# EAGLE board NINJA-001 (EAGLE 9.6.1)
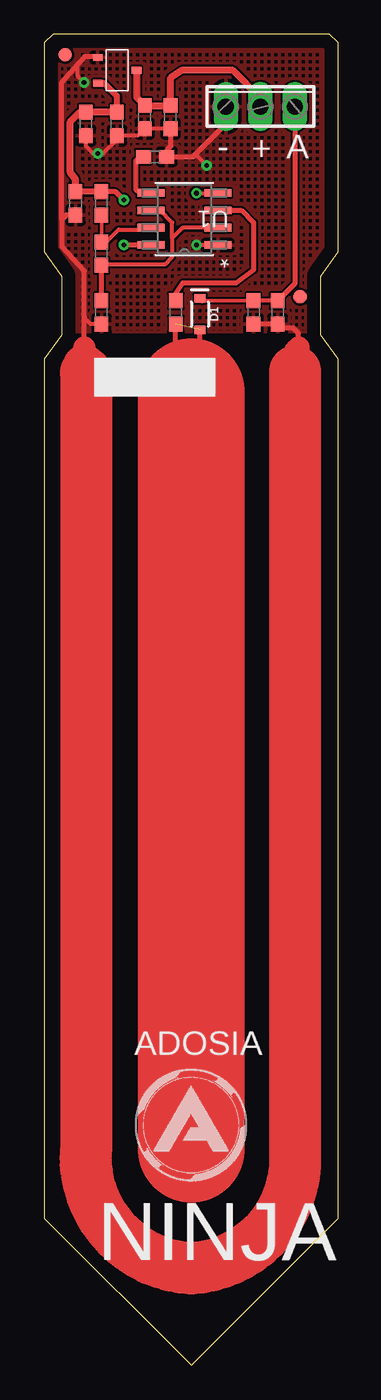
[diagram p0: board, top side]
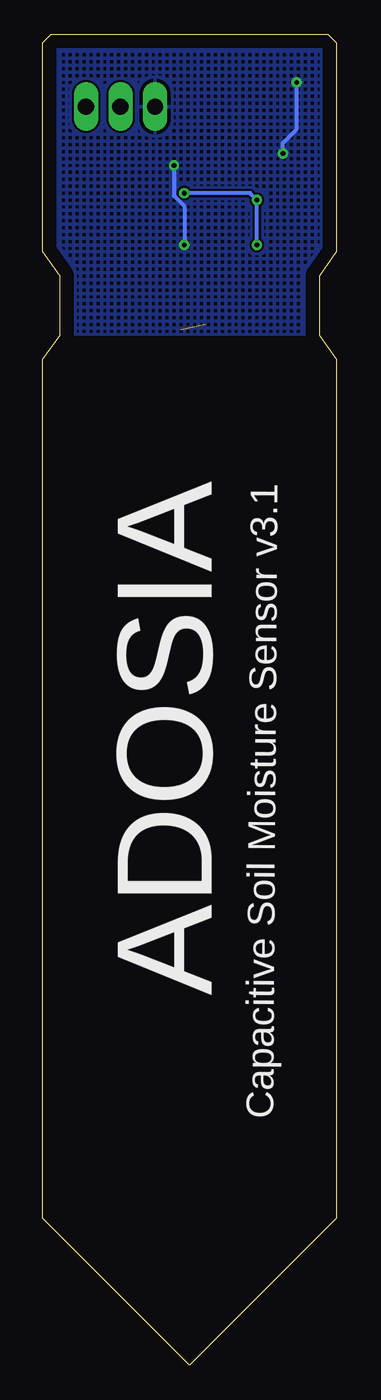
[diagram p1: board, bottom side, seen from below]

Size 21.59 x 97.79 mm. Coordinates in mm from the lower left corner, seen from the top.
Outline: 10.79,0 21.59,10.79 21.59,73.91 20.32,75.69 20.32,80.01 21.59,81.79 21.59,97.16 20.95,97.79 0.64,97.79 0,97.16 0,81.79 1.27,80.01 1.27,75.69 0,73.91 0,10.79 10.79,0
Copper layers (1*16): Top 0.035mm / dielectric 1.5mm / Bottom 0.035mm
Design rules "default": minimum track width 6mil, minimum drill 0.35mm, track to track 6mil, track to pad 6mil, pad to pad 6mil, via to via 6mil, smd to smd 6mil, copper to edge 40mil, drill to drill 6mil, minimum pad ring 10mil, minimum via ring 8mil, stop-mask expansion 4mil, vias tented up to drill 0mil, thermal gap 10mil

## Footprints (pad centres in the part's own frame; a part is rotated, then mirrored left to right if it is on the bottom)
0603 = smd 1.1 x 1: 1 -0.85,0; 2 0.85,0
SOD-323 = smd 0.63 x 0.83: A 1.15,0; C -1.15,0
FIDUCIAL-1X2 = smd 1 x 1: 1 0,0
3POL254 = drill 1.2 long: 1 -2.54,0; 2 0,0; 3 2.54,0
XC6206_SOT-23 = smd 0.5 x 0.7: 1 -0.95,-1.415; 2 0.95,-1.415; 3 0,1.44
D8 = smd 1.981 x 0.559: 1 -2.464,1.905; 2 -2.464,0.635; 3 -2.464,-0.635; 4 -2.464,-1.905; 5 2.464,-1.905; 6 2.464,-0.635; 7 2.464,0.635; 8 2.464,1.905

## Placement (x,y rotation side)
C1  0.1uF  [0603]  5.33,91.19 90 top
C2  4.7uF  [0603]  3.05,91.19 90 top
C3  1.0uF  [0603]  17.14,77.34 90 top
C4  0.1uF  [0603]  2.29,85.34 270 top
C5  470pF  [0603]  4.19,77.34 270 top
C6  0.1uF  [0603]  9.27,91.69 90 top
C7  10nF  [0603]  8.13,88.77 180 top
C8  4.7uF  [0603]  7.37,91.69 90 top
D1  1N4148WS  [SOD-323]  11.43,77.22 270 top
FD1  FIDUCIAL1X2  [FIDUCIAL-1X2]  18.8,78.49 0 top
FD2  FIDUCIAL1X2  [FIDUCIAL-1X2]  1.52,96.27 0 top
J1  SIP3  [3POL254]  15.88,92.46 0 top
P1  XC6206P302  [XC6206_SOT-23]  5.33,95.12 270 top
R1  1M  [0603]  15.37,77.34 270 top
R2  10k  [0603]  9.65,77.34 270 top
R3  330  [0603]  4.19,85.34 90 top
R4  1.6k  [0603]  4.19,81.66 270 top
U1  TLC555CDR  [D8]  10.29,84.2 180 top

## Library data of the parts
C1 C4 C6 = SparkFun-Capacitors; PROD_ID: CAP-08604
C2 C8 = SparkFun-Capacitors; PROD_ID: CAP-08280
C3 = SparkFun-Capacitors; PROD_ID: CAP-00868
C5 = SparkFun-Capacitors; PROD_ID: CAP-07884
C7 = SparkFun-Capacitors; PROD_ID: CAP-00867
D1 = SparkFun-DiscreteSemi; PROD_ID: DIO-09646
FD1 FD2 = SparkFun-Aesthetics
J1 = con-phoenix-254; OC_FARNELL: unknown; OC_NEWARK: unknown
P1 = Voltage-Regulator-Custom
R1 = SparkFun-Resistors; PROD_ID: RES-07868
R2 = SparkFun-Resistors; PROD_ID: RES-00824
R3 = SparkFun-Resistors; PROD_ID: RES-00818
R4 = SparkFun-Resistors; PROD_ID: RES-08361
U1 = TLC555CDR; MANUFACTURER_PART_NUMBER: TLC555CDR; VENDOR: Texas Instruments

## Nets
A: C3.2 D1.C J1.3 R1.1
GND: C1.1 C2.1 C3.1 C4.2 C5.2 C6.1 C7.1 C8.1 J1.1 P1.1 R1.2 U1.1
N$1: R2.1 U1.3
N$3: D1.A R2.2
N$4: R3.1 R4.1 U1.7
N$5: C7.2 U1.5
N$6: C5.1 R4.2 U1.2 U1.6
VCC: C6.2 C8.2 J1.2 P1.3
VDD: C1.2 C2.2 C4.1 P1.2 R3.2 U1.4 U1.8

## Tracks (layer width: path | path; a pad name or v marks a point on that pad's centre or on a via)
A
  Top 0.254: 11.6,78.19 15.29,78.19 R1.1
  Top 0.305: 17.05,78.19 15.29,78.19
  Top 0.356: D1.C 11.6,78.19 | 17.05,78.19 C3.2 18.41,79.46 J1.3
GND  (via drill 0.35)
  Top 0.152: 2.92,74.78 3.05,74.65 3.05,72.9
  Top 0.305: v11.94,88.14 11.11,88.96 | U1.1 v11.18,82.3 | C6.1 C8.1 6.86,90.34 C1.1 5.33,90.04 4.32,89.03 v3.94,89.03 3.56,89.03 3.05,89.53 C2.1 | v2.92,94.23 2.45,94.71 2.45,95.57 | C5.2 3.39,76.49 2.92,76.96
  Top 0.356: C6.1 9.27,89.53 9.02,89.28 9.02,88.94 C7.1 10.92,88.77 11.11,88.96 13.34,91.19 J1.1 | P1.1 3.85,96.14 2.95,96.14 2.58,95.71 2.45,95.57 1.27,94.23 1.27,84.17 | 1.27,84.17 1.27,82.17 2.92,80.39 2.92,76.96 2.92,74.78 | 18.67,74.78 18.67,75.82 18.29,76.2 17.57,76.2 C3.1 R1.2 | C4.2 1.6,84.49 1.27,84.17
  Top 1.6: 2.92,73.41 2.92,74.78 | 18.41,73.03 18.41,74.52 18.67,74.78
  Top 3.175: 3.05,72.9 3.05,73.28 2.92,73.41
  Top 3.81: 3.05,72.9 3.05,15.73 arc90 10.79,7.13 arc90 18.41,15.59 18.41,73.03
  Bottom 0.305: v11.18,82.3 11.18,85.14 11.94,85.9 v11.94,88.14 | v3.94,89.03 3.94,89.79 2.92,90.81 v2.92,94.23
  pour Top (hatched): -0.63,75.95 22.35,75.95 22.35,98.42 -0.51,98.42
  pour Bottom (hatched): -0.38,98.42 -0.64,75.69 22.1,75.69 22.48,76.07 22.48,98.42 22.35,98.55
N$1
  Top 0.356: R2.1 9.65,78.74 10.16,79.5 14.1,79.5 15.37,80.45 15.37,83.95 14.48,84.84 U1.3
N$2
  cutout Bottom: -0.64,75.56 -0.64,75.44 22.35,75.44 22.35,65.53 22.35,-0.38 22.35,-0.51 -0.51,-0.51 -0.51,75.56
N$3  (1 unrouted)
  Top 0.305: 11.43,75.44 10.79,74.8 10.79,74.04 | 10.79,73.88 9.61,75.06 | 10.79,71.5 10.79,73.28 | 10.79,73.28 11.43,73.91 | 10.79,73.28 10.79,74.04 | 10.79,74.04 11.43,74.68
  Top 0.356: 9.61,75.06 9.65,75.07 R2.2 | 11.43,73.91 11.43,74.68 11.43,75.44 D1.A | 10.79,71.5 10.67,72.02
  Top 7.874: 10.79,15.88 10.79,71.5
N$4
  Top 0.254: R3.1 R4.1
  Top 0.305: R4.1 4.53,82.51 5.46,83.44 7.7,83.44 U1.7
N$5
  Top 0.356: U1.5 7.24,86.11 7.11,86.23 6.86,86.23 6.73,86.36 6.73,88.52 C7.2
N$6
  Top 0.305: R4.2 4.28,80.9 8.89,80.9 9.4,81.41 9.4,82.8 | 9.4,82.8 9.4,83.95 8.51,84.84 U1.6 | U1.2 10.16,83.57 9.4,82.8
  Top 0.356: C5.1 R4.2
N$7
  cutout Top: -0.51,75.69 -0.51,75.44 22.61,75.44 22.61,-0.64 -0.76,-0.64 -0.76,75.56 -0.25,75.56
VCC
  Top 0.508: P1.3 6.77,93.14 C8.2 C6.2 9.27,94.57 10.1,95.12 13.84,95.12 15.88,93.09 J1.2
VDD  (via drill 0.35)
  Top 0.305: 2.29,86.57 C4.1 | v11.18,86.11 U1.4
  Top 0.356: 2.66,86.19 2.29,86.57 | U1.8 v5.84,82.3 | v5.84,85.6 5.25,86.19 R3.2
  Top 0.457: R3.2 2.66,86.19 | C1.2 5.33,93.23 4.39,94.17 P1.2
  Top 0.508: C2.2 3.04,92.05 | 2.29,86.57 2.29,87.12 1.91,87.63 1.91,91.34 2.6,92.04 C2.2 | C1.2 C2.2
  Bottom 0.305: v5.84,82.3 v5.84,85.6 6.35,86.11 v11.18,86.11

## Text on the board
tNames: - | + | A | - | ADOSIA | NINJA
bNames: Capacitive Soil Moisture Sensor v3.1 | ADOSIA